# EAGLE board Spectroscilloscope Revised_3 (EAGLE 9.6.2)
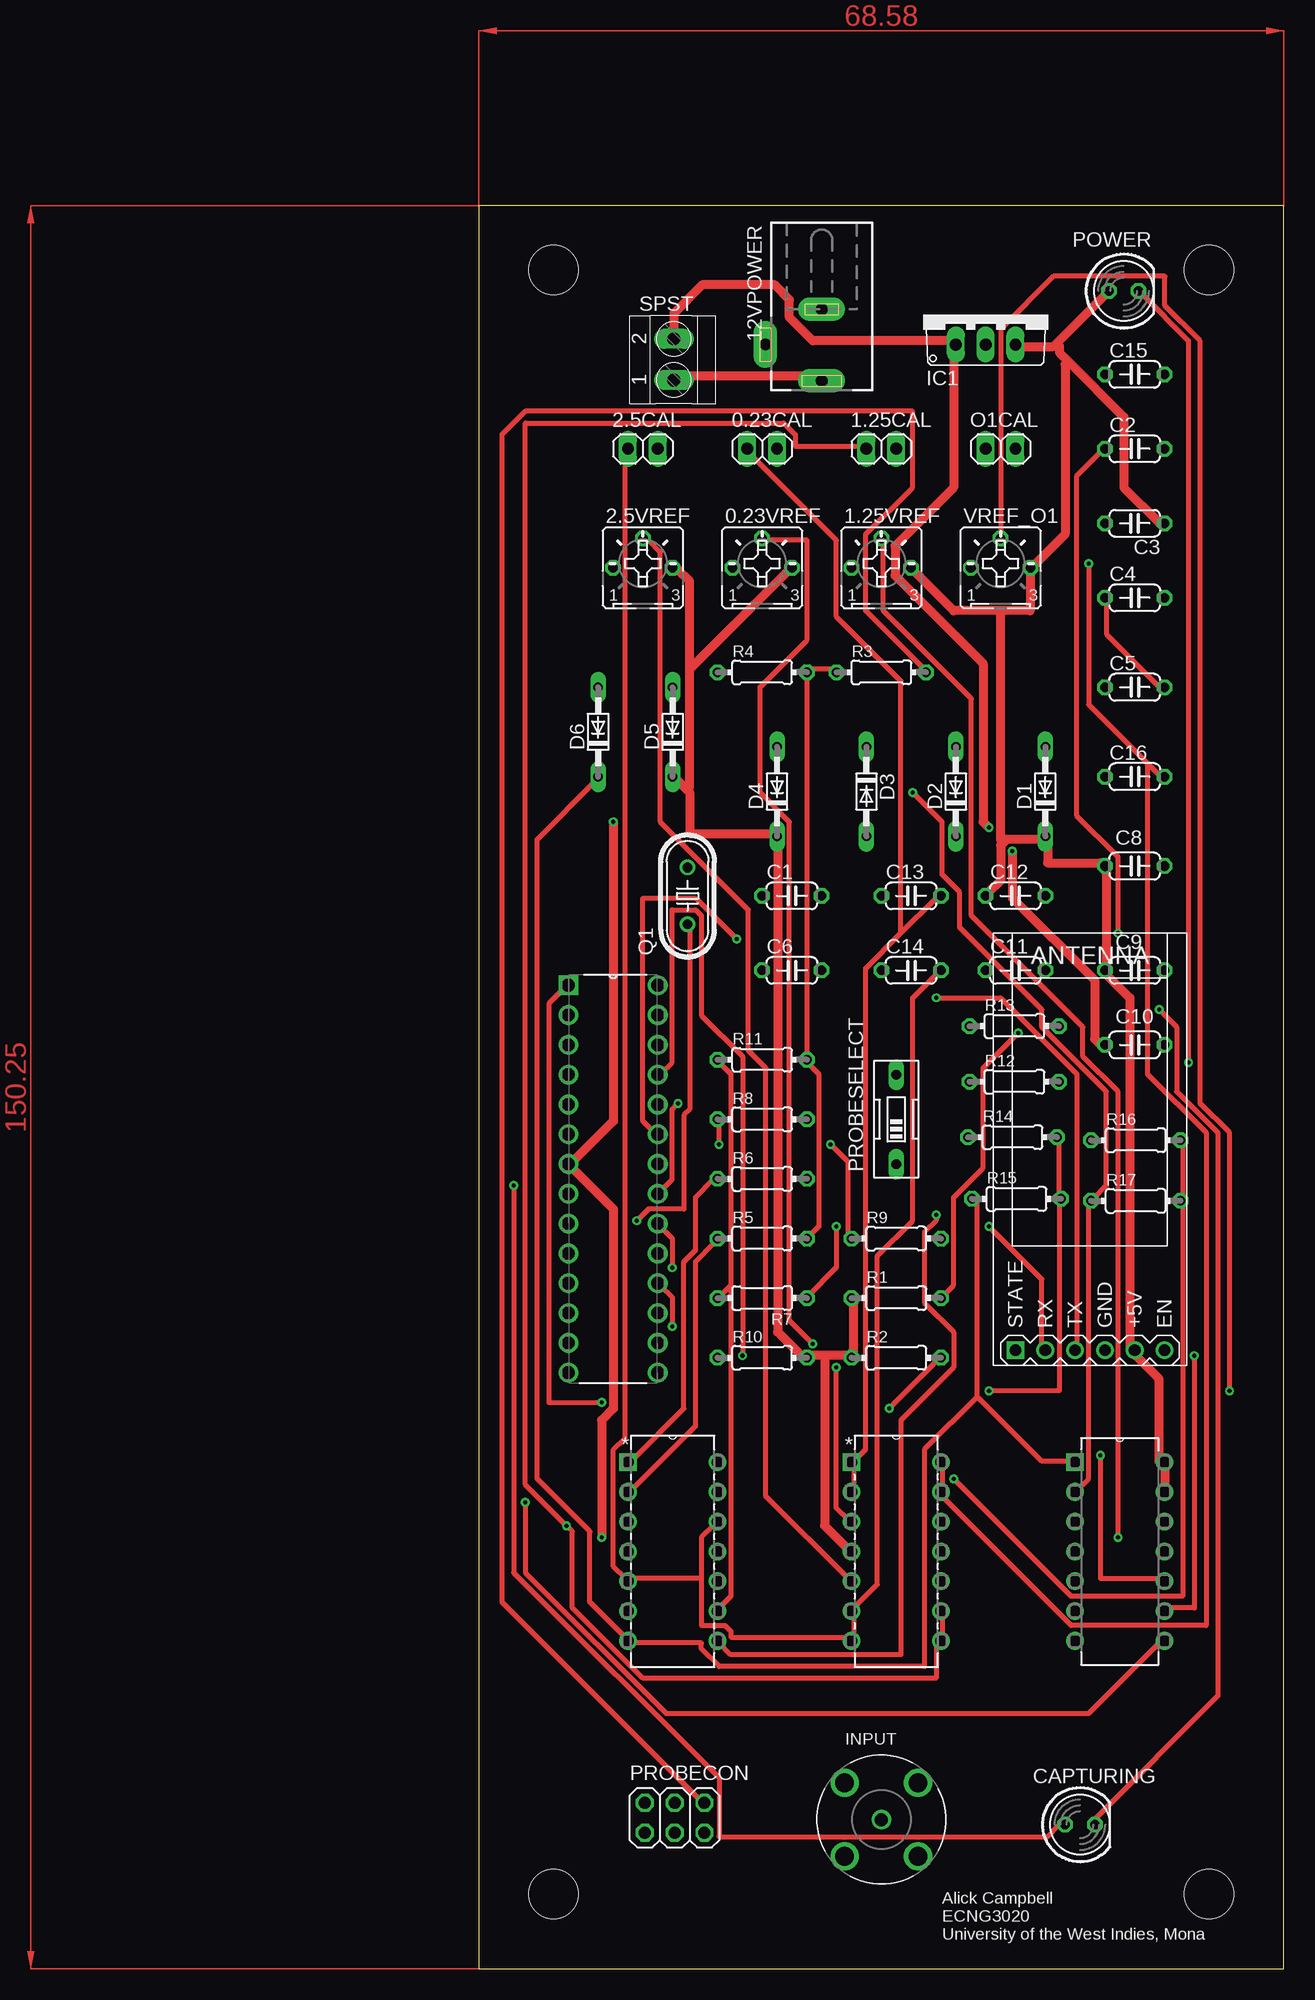
[diagram p0: board, top side]
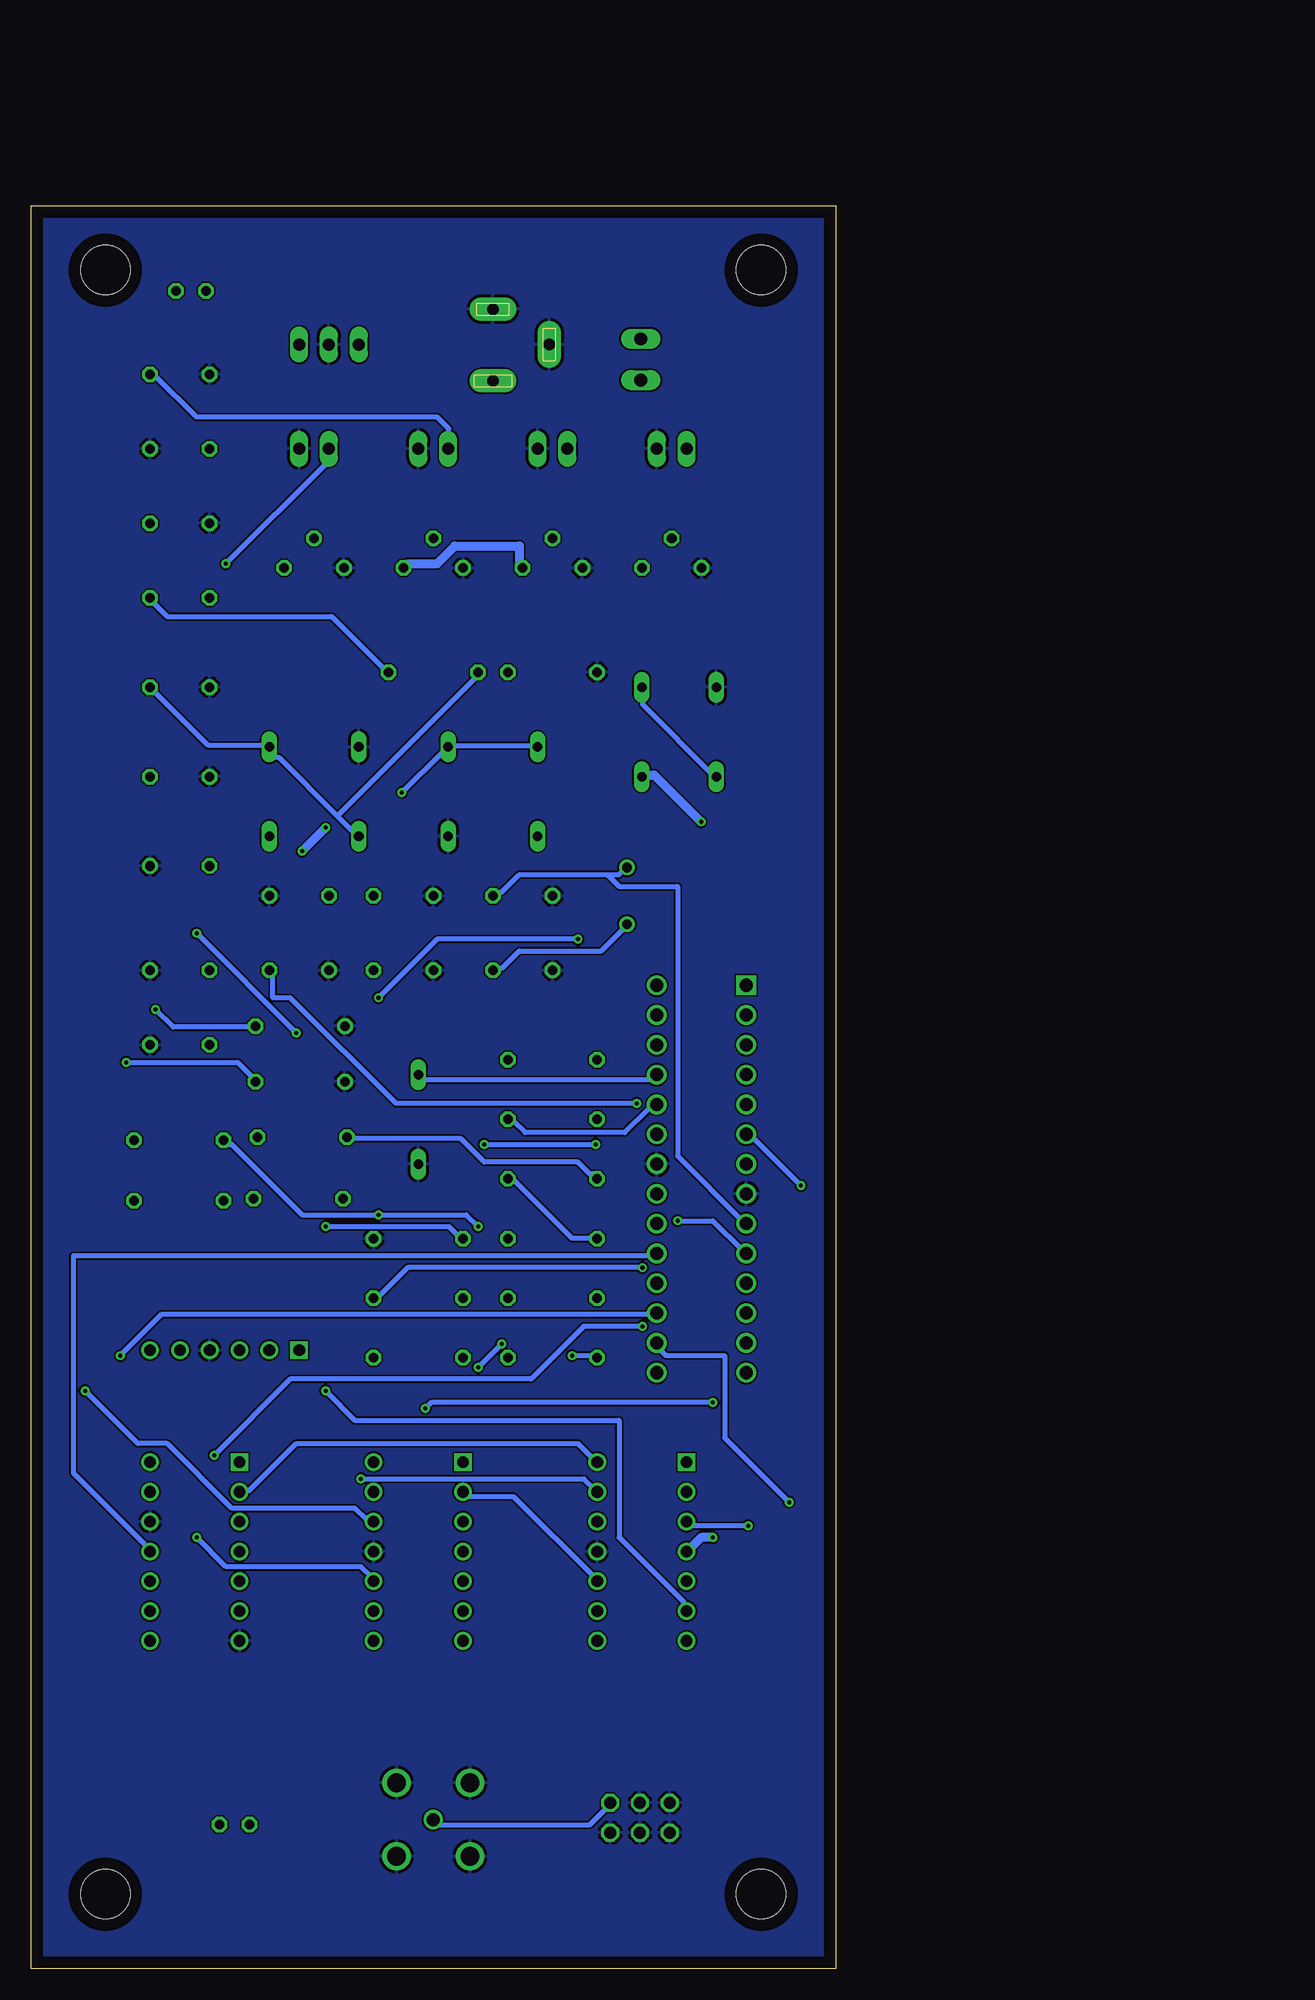
[diagram p1: board, bottom side, seen from below]

Size 68.56 x 150.25 mm. Coordinates in mm from the lower left corner, seen from the top.
Outline: 0,0 68.56,0 68.56,150.25 0,150.25 0,0
Copper layers (1*16): Top 0.035mm / dielectric 1.5mm / Bottom 0.035mm
Design rules "default": minimum track width 6mil, minimum drill 0.35mm, track to track 6mil, track to pad 6mil, pad to pad 6mil, via to via 6mil, smd to smd 6mil, copper to edge 40mil, drill to drill 6mil, minimum pad ring 10mil, minimum via ring 8mil, stop-mask expansion 4mil, vias tented up to drill 0mil, thermal gap 10mil
Net classes: 0 default: width 0.406 mm, clearance 0.102 mm; 1 Power Lines: width 0.762 mm, clearance 0.13 mm
Holes 4.2 mm at 6.35,6.35 62.23,6.35 62.23,144.78 6.35,144.78

## Footprints (pad centres in the part's own frame; a part is rotated, then mirrored left to right if it is on the bottom)
1X02 = drill 1.016 long: 1 -1.27,0; 2 1.27,0
B25P = drill 0.813 octagon: A -2.54,0; E 2.54,0; S 0,2.54
DCJ0303 = drill 1 pad 2 long: 1 0,3.1; 2 4.8,0; 3 0,-3
C050-024X044 = drill 0.813 octagon: 1 -2.54,0; 2 2.54,0
LED5MM = drill 0.813 octagon: A -1.27,0; K 1.27,0
DO34-7 = drill 0.813 long: A 3.81,0; C -3.81,0
WIRELESS-BLUETOOTH-HC-05 = drill 1 square: 1 -6.35,-17.145 | drill 1: 2 -3.81,-17.145; 3 -1.27,-17.145; 4 1.27,-17.145; 5 3.81,-17.145; 6 6.35,-17.145
TO220V = drill 1.016 long: 1 -2.54,-2.54; 2 0,-2.54; 3 2.54,-2.54
TE_5-1634503-1 = drill 1.1: 1 0,0 | drill 1.6: 2 -3.13,3.13; 3 3.13,3.13; 4 3.13,-3.13; 5 -3.13,-3.13
2X03 = drill 1.016 octagon: 1 -2.54,-1.27; 2 -2.54,1.27; 3 0,-1.27; 4 0,1.27; 5 2.54,-1.27; 6 2.54,1.27
EDG-01 = drill 0.813 long: 1 0,-3.81; 2 0,3.81
HC49U-V = drill 0.813: 1 -2.413,0; 2 2.413,0
0204/7 = drill 0.813 octagon: 1 -3.81,0; 2 3.81,0
TERMINAL-BLOCK-2-PIN-3.5MM-LONG-PAD = drill 1.1 pad 1.7 long: 1 -1.75,-0.1; 2 1.75,-0.1
DIP254P762X457-28 = drill 1.118 square: 1 -7.62,33.02 | drill 1.118: 2 -7.62,30.48; 3 -7.62,27.94; 4 -7.62,25.4; 5 -7.62,22.86; 6 -7.62,20.32; 7 -7.62,17.78; 8 -7.62,15.24; 9 -7.62,12.7; 10 -7.62,10.16; 11 -7.62,7.62; 12 -7.62,5.08; 13 -7.62,2.54; 14 -7.62,0; 15 0,0; 16 0,2.54; 17 0,5.08; 18 0,7.62; 19 0,10.16; 20 0,12.7; 21 0,15.24; 22 0,17.78; 23 0,20.32; 24 0,22.86; 25 0,25.4; 26 0,27.94; 27 0,30.48; 28 0,33.02
DIP254P762X533-14 = drill 0.991 square: 1 -7.62,15.24 | drill 0.991: 2 -7.62,12.7; 3 -7.62,10.16; 4 -7.62,7.62; 5 -7.62,5.08; 6 -7.62,2.54; 7 -7.62,0; 8 0,0; 9 0,2.54; 10 0,5.08; 11 0,7.62; 12 0,10.16; 13 0,12.7; 14 0,15.24
DIP254P762X432-14 = drill 0.991 square: 1 -7.62,15.24 | drill 0.991: 2 -7.62,12.7; 3 -7.62,10.16; 4 -7.62,7.62; 5 -7.62,5.08; 6 -7.62,2.54; 7 -7.62,0; 8 0,0; 9 0,2.54; 10 0,5.08; 11 0,7.62; 12 0,10.16; 13 0,12.7; 14 0,15.24

## Placement (x,y rotation side)
0.23CAL  [1X02]  24.13,129.54 0 top
0.23VREF  100k  [B25P]  24.13,119.38 0 top
1.25CAL  [1X02]  34.29,129.54 0 top
1.25VREF  100k  [B25P]  34.29,119.38 0 top
2.5CAL  [1X02]  13.97,129.54 0 top
2.5VREF  100k  [B25P]  13.97,119.38 0 top
12VPOWER  [DCJ0303]  29.21,138.43 180 top
C1  22pF  [C050-024X044]  26.67,91.44 0 top
C2  0.1uF  [C050-024X044]  55.88,129.54 0 top
C3  0.1u  [C050-024X044]  55.88,123.19 180 top
C4  22pF  [C050-024X044]  55.88,116.84 0 top
C5  180pF  [C050-024X044]  55.88,109.22 0 top
C6  22pF  [C050-024X044]  26.67,85.09 0 top
C8  0.1uF  [C050-024X044]  55.88,93.98 0 top
C9  10uF  [C050-024X044]  55.88,85.09 0 top
C10  220uF  [C050-024X044]  55.88,78.74 0 top
C11  0.1uF  [C050-024X044]  45.72,85.09 0 top
C12  10nF  [C050-024X044]  45.72,91.44 0 top
C13  0.1u  [C050-024X044]  36.83,91.44 0 top
C14  0.1u  [C050-024X044]  36.83,85.09 0 top
C15  0.1u  [C050-024X044]  55.88,135.89 0 top
C16  0.1u  [C050-024X044]  55.88,101.6 0 top
CAPTURING  [LED5MM]  51.22,12.27 0 top
D1  BAT81  [DO34-7]  48.26,100.33 90 top
D2  BAT81  [DO34-7]  40.64,100.33 90 top
D3  BAT81  [DO34-7]  33.02,100.33 270 top
D4  BAT81  [DO34-7]  25.4,100.33 90 top
D5  BAT81  [DO34-7]  16.51,105.41 90 top
D6  BAT81  [DO34-7]  10.16,105.41 90 top
HC05  WIRELESS-BLUETOOTH-HC-05  [WIRELESS-BLUETOOTH-HC-05]  52.07,69.85 0 top
IC1  7805TV  [TO220V]  43.18,140.97 0 top
INPUT  5-1634503-1  [TE_5-1634503-1]  34.29,12.7 0 top
O1CAL  [1X02]  44.45,129.54 0 top
POWER  [LED5MM]  54.94,142.98 0 top
PROBECON  [2X03]  16.68,12.86 0 top
PROBESELECT  [EDG-01]  35.56,72.39 0 top
Q1  16MHz  [HC49U-V]  17.78,91.44 90 top
R1  10k  [0204/7]  35.56,57.15 0 top
R2  10k  [0204/7]  35.56,52.07 0 top
R3  909k  [0204/7]  34.29,110.49 0 top
R4  100k  [0204/7]  24.13,110.49 0 top
R5  1k  [0204/7]  24.13,62.23 0 top
R6  1k  [0204/7]  24.13,67.31 0 top
R7  10k  [0204/7]  24.13,57.15 180 top
R8  1k  [0204/7]  24.13,72.39 0 top
R9  2k  [0204/7]  35.56,62.23 0 top
R10  10k  [0204/7]  24.13,52.07 0 top
R11  1k  [0204/7]  24.13,77.47 0 top
R12  330  [0204/7]  45.63,75.6 0 top
R13  330  [0204/7]  45.63,80.34 0 top
R14  1k  [0204/7]  45.47,70.87 0 top
R15  1k  [0204/7]  45.81,65.61 0 top
R16  1k  [0204/7]  55.97,70.61 0 top
R17  1k  [0204/7]  55.97,65.45 0 top
SPST  TERMINAL-BLOCK-3.5MM-2-PIN-LONG-PAD  [TERMINAL-BLOCK-2-PIN-3.5MM-LONG-PAD]  16.51,137.16 90 top
U1  ATMEGA328P-PU  [DIP254P762X457-28]  15.24,50.8 0 top
U2  MCP6024-I/P  [DIP254P762X533-14]  20.32,27.94 0 top
U3  MCP6024-I/P  [DIP254P762X533-14]  39.37,27.94 0 top
U$1  MCP3004-I/P  [DIP254P762X432-14]  58.42,27.94 0 top
VREF_O1  100k  [B25P]  44.45,119.38 0 top

## Library data of the parts
0.23CAL 1.25CAL 2.5CAL O1CAL PROBECON = pinhead
0.23VREF 1.25VREF 2.5VREF VREF_O1 = pot
12VPOWER = con-jack
C1-C6 C8-C16 = rcl; SPICEPREFIX: C
CAPTURING POWER = led
D1-D6 = diode
HC05 = diy-modules
IC1 = linear
INPUT = 5-1634503-1; AVAILABILITY: Good; COMMENT: 5-1634503-1; DESCRIPTION: Rf / Coaxial Connector, Bnc Coaxial, Straight Jack, Solder, 50 Ohm, Brass; EU_ROHS_COMPLIANCE: Compliant; MF: TE Connectivity; MP: 5-1634503-1; NUMBER_OF_POSITIONS: 1; PACKAGE: None; PRICE: None; PURCHASE-URL: https://pricing.snapeda.com/search/part/5-1634503-1/?ref=eda
PROBESELECT = special
Q1 = crystal; OC_FARNELL: 1666969; OC_NEWARK: unknown
R1-R17 = rcl; SPICEPREFIX: R
SPST = Rembrandt Electronics - Terminal Block 3-5mm v1-0
U1 = ATMEGA328P-PU; AVAILABILITY: Good; DESCRIPTION: AVR AVR® ATmega Microcontroller IC 8-Bit 20MHz 32KB (16K x 16) FLASH 28-PDIP; DIGIKEY-PURCHASE-URL: https://snapeda.com/shop?store=DigiKey&id=2895131; MF: Microchip; MOUSER-PURCHASE-URL: https://snapeda.com/shop?store=Mouser&id=2895131; MP: ATMEGA328P-PU; PACKAGE: DIP-28 Generic; PRICE: None
U2 U3 = MCP6024-I_P; AVAILABILITY: Warning; DESCRIPTION: IC OPAMP GP 4 CIRCUIT 14DIP; MF: Microchip Technology; MP: MCP6024-I/P; PACKAGE: None; PRICE: None; PURCHASE-URL: https://pricing.snapeda.com/search/part/MCP6024-I/P/?ref=eda
U$1 = MCP3004-I_P; AVAILABILITY: Unavailable; DESCRIPTION: 10 Bit Analog to Digital Converter 2, 4 Input 1 SAR 14-PDIP; MF: Microchip; MP: MCP3004-I/P; PACKAGE: DIP-14 Microchip; PRICE: None

## Nets
0.23VREF: 0.23CAL.1 C13.2 U2.10 U3.1 U3.2
1.25VREF: 1.25CAL.1 C15.2 U2.3 U3.8 U3.9
1X/10X: PROBESELECT.2 R10.1 U1.25
2.5VREF: 2.5CAL.1 C14.2 U2.5 U2.12 U3.6 U3.7
+12V [Power Lines]: C10.1 IC1.1 SPST.2
+12VI [Power Lines]: 12VPOWER.1 SPST.1
CAPTURING: CAPTURING.A U1.6
COMPANDED: C4.1 C5.2 D1.A D2.C R3.1 R4.2 R5.2 R11.2
GND [Power Lines]: 0.23CAL.2 0.23VREF.A 1.25CAL.2 1.25VREF.A 2.5CAL.2 2.5VREF.A 12VPOWER.2 12VPOWER.3 C1.1 C2.2 C3.2 C5.1 C6.1 C8.2 C9.2 C10.2 C11.1 C12.2 C13.1 C14.1 C15.1 C16.1 D2.A D3.A D6.A HC05.4 IC1.2 INPUT.2 INPUT.3 INPUT.4 INPUT.5 O1CAL.2 PROBECON.1 PROBECON.2 PROBECON.3 PROBECON.4 PROBECON.5 PROBESELECT.1 R4.1 R9.2 R12.1 R13.1 U1.8 U1.22 U2.11 U3.11 U$1.7 U$1.12 VREF_O1.A
KEY: HC05.6
MISO: U1.18 U$1.10
MOSI: U1.17 U$1.9
N$1: C1.2 Q1.2 U1.9
N$2: C6.2 Q1.1 U1.10
N$3: 2.5VREF.S U3.5
N$4: R6.1 R14.1 U2.1
N$5: R5.1 R6.2 U2.2
N$6: C11.2 U1.21
N$7: 1.25VREF.S U3.10
N$8: C2.1 R1.2 U1.20
N$9: 0.23VREF.S U3.3
N$10: U3.12 VREF_O1.S
N$12: POWER.K R12.2
N$13: CAPTURING.K R13.2
N$15: R14.2 R15.2 U2.6
N$16: R7.2 R11.1 U2.9
N$17: R8.2 U1.24
N$21: R16.2 R17.2 U2.13
N$22: R7.1 R16.1 U2.8
RST: R2.2 U1.1
RX: HC05.2 R8.1 R9.1
SCK: U1.19 U$1.11
STATE: HC05.1
TX: HC05.3 U1.23
VCC [Power Lines]: 0.23VREF.E 1.25VREF.E 2.5VREF.E C3.1 C8.1 C9.1 C12.1 D1.C D4.C D5.C HC05.5 IC1.3 POWER.A R1.1 R2.1 R10.2 U1.7 U2.4 U3.4 U$1.13 U$1.14 VREF_O1.E
VIN: C4.2 INPUT.1 PROBECON.6 R3.2
VREF_O1: C16.2 O1CAL.1 U3.13 U3.14
X1: D5.A D6.C R15.1 U2.7 U$1.1
X10: D3.C D4.A R17.1 U2.14 U$1.2
~SS: U1.16 U$1.8

## Tracks (layer width: path | path; a pad name or v marks a point on that pad's centre or on a via)
0.23VREF
  Top 0.406: 35.96,88.25 32.96,85.25 32.96,44.25 31.96,43.25 U3.1 31.96,42.75 31.96,40.75 U3.2 | 35.96,88.25 38.96,91.25 C13.2 | 35.96,88.25 35.96,109.75 30.46,115.25 30.46,121.75 22.96,129.25 0.23CAL.1
  Bottom 0.406: U2.10 20.46,33.25 27.46,40.25 31.46,40.25 U3.2
1.25VREF  (via drill 0.35)
  Top 0.406: U3.9 39.46,30.25 39.46,28.25 U3.8 38.96,27.75 38.96,24.75 13.96,24.75 7.96,30.75 7.96,37.25 v7.46,37.75 3.96,41.25 3.96,131.75 25.96,131.75 26.96,130.75 26.96,129.75 32.96,129.75 1.25CAL.1
  Bottom 0.406: C15.2 57.96,135.75 54.46,132.25 33.96,132.25 32.96,131.25 32.96,129.75 1.25CAL.1 | v7.46,37.75 12.46,37.75 U2.3
1X/10X  (via drill 0.35)
  Top 0.406: v22.46,52.25 22.46,77.75 18.96,81.25 18.96,89.75 18.46,90.25 16.46,90.25 16.46,77.25 15.46,76.25 U1.25
  Bottom 0.406: v22.46,52.25 20.46,52.25 R10.1 | PROBESELECT.2 35.46,75.75 15.46,75.75 U1.25
2.5VREF
  Top 0.406: C14.2 38.96,84.75 36.96,82.75 36.96,63.75 33.96,60.75 33.96,32.75 31.96,30.75 U3.6 31.96,30.25 31.96,28.25 U3.7 31.46,28.25 21.46,28.25 21.46,28.75 20.96,29.25 18.96,29.25 18.96,33.25 | 18.96,33.25 12.96,33.25 U2.5 12.46,33.25 11.46,34.25 11.46,44.25 12.46,45.25 12.46,129.25 2.5CAL.1 | 18.96,33.25 18.96,36.75 19.96,37.75 U2.12
+12V  (via drill 0.35)
  Top 0.762: v45.46,95.25 45.46,91.25 52.46,84.25 52.46,79.25 52.96,78.75 C10.1 | v43.46,97.25 42.96,97.75 42.96,111.25 35.46,118.75 35.46,121.25 40.46,126.25 40.46,138.25 IC1.1 40.46,138.75 28.46,138.75 26.46,140.75 26.46,142.25 25.2,143.51 19.05,143.51 16.61,141.07 SPST.2
  Bottom 0.762: v43.46,97.25 v45.46,95.25
+12VI
  Top 0.762: 12VPOWER.1 28.96,135.75 16.95,135.75 SPST.1
CAPTURING  (via drill 0.35)
  Top 0.406: v2.96,66.75 2.96,33.75 20.46,16.25 20.46,11.25 48.46,11.25 49.46,12.25 CAPTURING.A
  Bottom 0.406: v2.96,66.75 6.96,70.75 7.46,70.75 U1.6
COMPANDED
  Top 0.406: C5.2 57.96,109.25 53.46,113.75 53.46,116.75 C4.1 | R3.1 30.46,110.75 27.96,110.75 R4.2 27.96,110.25 27.96,77.75 R11.2 27.96,77.25 28.96,76.25 28.96,63.25 R5.2
  Bottom 0.406: 42.46,98.25 47.46,103.25 47.96,103.25 48.46,103.75 D1.A 48.46,104.25 53.46,104.25 57.96,108.75 C5.2 | 42.46,98.25 40.96,96.75 D2.C | 42.46,98.25 30.46,110.25 R3.1
GND
  pour Bottom: 0,0 68.58,0 68.58,150.24 0,150.24
MISO  (via drill 0.35)
  Top 0.406: v52.96,43.75 52.96,33.25 57.96,33.25 U$1.10 | v16.46,54.75 16.46,57.25 15.46,58.25 U1.18
  Bottom 0.406: v52.96,43.75 46.46,50.25 25.96,50.25 21.46,54.75 v16.46,54.75
MOSI  (via drill 0.35)
  Top 0.406: v60.96,52.25 60.96,30.75 58.46,30.75 U$1.9
  Bottom 0.406: v60.96,52.25 57.46,55.75 15.46,55.75 U1.17
N$1
  Bottom 0.406: 19.46,93.25 26.96,93.25 28.46,91.75 28.96,91.75 C1.2 | 19.46,93.25 18.46,93.25 17.96,93.75 Q1.2 | 19.46,93.25 18.46,92.25 13.46,92.25 13.46,69.25 7.96,63.75 U1.9
N$2  (via drill 0.35)
  Top 0.406: v13.46,63.75 14.46,64.75 17.46,64.75 17.46,72.75 17.96,73.25 17.96,88.75 Q1.1
  Bottom 0.406: Q1.1 17.96,88.75 19.96,86.75 26.96,86.75 28.46,85.25 28.96,85.25 C6.2 | v13.46,63.75 10.46,63.75 7.96,61.25 U1.10
N$3
  Top 0.406: 2.5VREF.S 14.46,121.75 15.46,120.75 15.46,97.75 22.96,90.25 22.96,78.25 24.46,76.75 24.46,40.25 31.46,33.25 U3.5
N$4
  Top 0.406: R6.1 19.96,67.25 18.46,65.75 18.46,61.25 17.46,60.25 17.46,47.75 12.96,43.25 U2.1
  Bottom 0.406: R14.1 41.46,70.75 31.96,70.75 29.96,68.75 21.96,68.75 20.96,67.75 20.46,67.75 R6.1
N$5
  Top 0.406: R5.1 19.96,61.75 18.46,60.25 18.46,46.25 12.96,40.75 U2.2
  Bottom 0.406: R6.2 27.46,67.25 22.46,62.25 20.46,62.25 R5.1
N$6  (via drill 0.35)
  Top 0.406: v16.96,73.75 16.46,73.25 16.46,67.25 15.46,66.25 U1.21
  Bottom 0.406: v16.96,73.75 37.46,73.75 46.46,82.75 47.96,82.75 47.96,84.75 C11.2
N$7  (via drill 0.35)
  Top 0.406: v54.46,36.75 54.46,74.75 51.46,77.75 51.46,80.25 41.96,89.75 41.96,108.25 34.46,115.75 34.46,121.75 1.25VREF.S
  Bottom 0.406: v54.46,36.75 51.96,34.25 40.46,34.25 39.46,33.25 U3.10
N$8  (via drill 0.35)
  Top 0.406: v16.46,59.75 16.46,62.25 15.46,63.25 U1.20 | v54.46,88.25 54.46,94.75 50.96,98.25 50.96,127.25 52.96,129.25 C2.1 | v45.96,79.75 42.96,76.75 42.96,68.25 40.46,65.75 40.46,58.25 39.46,57.25 R1.2
  Bottom 0.406: v16.46,59.75 36.46,59.75 38.96,57.25 R1.2 | v45.96,79.75 v54.46,88.25
N$9  (via drill 0.35)
  Top 0.406: v28.46,53.25 26.46,55.25 26.46,97.75 23.96,100.25 23.96,109.25 27.96,113.25 27.96,121.75 24.46,121.75 0.23VREF.S | v30.46,51.25 30.46,39.25 31.46,38.25 U3.3
  Bottom 0.406: v30.46,51.25 v28.46,53.25
N$10  (via drill 0.35)
  Top 0.406: v63.96,49.25 63.96,71.25 61.46,73.75 61.46,138.75 58.46,141.75 58.46,144.25 48.96,144.25 44.46,139.75 44.46,122.25 VREF_O1.S
  Bottom 0.406: v63.96,49.25 59.46,44.75 56.96,44.75 51.46,39.25 40.96,39.25 39.96,38.25 39.46,38.25 U3.12
N$12  (via drill 0.35)
  Top 0.406: v60.46,77.25 60.46,138.75 56.46,142.75 POWER.K
  Bottom 0.406: v60.46,77.25 50.96,77.25 49.46,75.75 R12.2
N$13  (via drill 0.35)
  Top 0.406: v57.96,81.75 59.46,80.25 59.46,74.75 62.96,71.25 62.96,23.25 52.46,12.75 CAPTURING.K
  Bottom 0.406: v57.96,81.75 56.46,80.25 49.46,80.25 R13.2
N$15  (via drill 0.35)
  Top 0.406: R14.2 49.46,70.75 49.46,65.75 R15.2 49.46,65.25 49.46,49.25 v43.46,49.25
  Bottom 0.406: v43.46,49.25 40.96,46.75 18.46,46.75 18.46,36.75 12.96,31.25 12.96,30.75 U2.6
N$16
  Top 0.406: 21.46,58.25 20.46,57.25 R7.2 | 21.46,58.25 21.46,76.25 20.46,77.25 R11.1 | 21.46,58.25 21.46,31.75 20.46,30.75 U2.9
N$17
  Bottom 0.406: R8.2 27.46,72.25 26.46,71.25 17.96,71.25 15.96,73.25 15.46,73.25 U1.24
N$21  (via drill 0.35)
  Top 0.406: R16.2 59.96,70.25 59.96,65.75 R17.2 59.96,65.25 59.96,31.75 50.46,31.75 v40.46,41.75
  Bottom 0.406: v40.46,41.75 21.46,41.75 20.46,40.75 U2.13
N$22  (via drill 0.35)
  Top 0.406: v30.46,63.25 30.46,59.75 27.96,57.25 R7.1 | v38.96,64.25 38.96,63.75 37.96,62.75 37.96,56.75 40.46,54.25 40.46,51.25 35.96,46.75 35.96,26.75 21.46,26.75 20.46,27.75 U2.8
  Bottom 0.406: v30.46,63.25 31.46,64.25 v38.96,64.25 45.46,64.25 51.46,70.25 51.96,70.25 R16.1
RST  (via drill 0.35)
  Top 0.406: v34.96,47.75 38.96,51.75 R2.2 | v10.46,48.25 5.96,48.25 5.96,82.25 7.46,83.75 U1.1
  Bottom 0.406: v34.96,47.75 34.46,48.25 v10.46,48.25
RX  (via drill 0.35)
  Top 0.406: v43.46,63.25 47.96,58.75 47.96,52.75 HC05.2 | v20.46,70.25 20.46,72.25 R8.1 | v29.96,70.25 31.46,68.75 31.46,62.25 R9.1
  Bottom 0.406: v43.46,63.25 32.96,63.25 31.96,62.25 R9.1 | v29.96,70.25 v20.46,70.25
SCK
  Bottom 0.406: U$1.11 58.46,35.75 64.96,42.25 64.96,60.75 15.46,60.75 U1.19
TX  (via drill 0.35)
  Top 0.406: v38.96,82.75 44.46,82.75 50.96,76.25 50.96,52.75 HC05.3 | v21.96,87.75 18.46,91.25 13.96,91.25 13.96,72.25 14.96,71.25 U1.23
  Bottom 0.406: v38.96,82.75 33.96,87.75 v21.96,87.75
VCC  (via drill 0.35)
  Top 0.762: v10.46,36.75 10.46,46.75 11.46,47.75 11.46,64.75 7.96,68.25 U1.7 7.96,68.75 11.46,72.25 v11.46,97.75 | 29.46,52.25 31.46,52.25 R2.1 31.96,52.25 31.96,56.75 R1.1 | 29.46,52.25 27.96,52.25 R10.2 27.46,52.25 25.46,54.25 25.46,96.25 D4.C 24.96,96.75 17.96,96.75 17.96,100.25 17.71,100.5 | 29.46,52.25 29.46,37.75 31.46,35.75 U3.4 | 17.71,100.5 16.96,101.25 D5.C | 17.96,110.75 17.96,100.75 17.71,100.5 | 17.96,110.75 17.96,118.25 16.96,119.25 2.5VREF.E | 17.96,110.75 26.46,119.25 0.23VREF.E | 1.25VREF.E 40.46,115.75 44.46,115.75 | 44.46,115.75 46.96,115.75 46.96,119.25 VREF_O1.E 47.46,119.75 49.96,122.25 49.96,136.75 50.21,137 | 49.21,138.5 48.96,138.25 45.96,138.25 IC1.3 | 49.21,138.5 53.46,142.75 POWER.A | 50.21,137 49.46,137.75 49.46,138.25 49.21,138.5 | 50.21,137 54.96,132.25 54.96,126.25 57.96,123.25 C3.1 | U$1.13 58.46,40.75 58.46,42.75 U$1.14 57.96,43.25 57.96,50.25 55.96,52.25 HC05.5 55.46,52.75 55.46,82.75 53.46,84.75 C9.1 53.46,85.25 53.46,93.75 C8.1 52.96,94.25 48.46,94.25 48.46,96.25 D1.C 47.96,96.25 44.96,96.25 44.71,96 | 44.71,96 44.46,95.75 44.46,92.75 43.46,91.75 C12.1 | 44.46,115.75 44.46,96.25 44.71,96
  Bottom 0.762: v10.46,36.75 11.46,36.75 12.46,35.75 U2.4 | v11.46,97.75 15.46,101.75 16.46,101.75 D5.C | 0.23VREF.E 26.96,119.75 26.96,121.25 32.46,121.25 33.96,119.75 36.46,119.75 1.25VREF.E
VIN
  Top 0.406: PROBECON.6 18.96,14.25 1.96,31.25 1.96,130.75 3.96,132.75 36.96,132.75 36.96,126.25 32.96,122.25 32.96,115.75 37.96,110.75 R3.2
  Bottom 0.406: PROBECON.6 19.46,13.75 20.96,12.25 33.96,12.25 INPUT.1 | R3.2 38.46,110.75 42.96,115.25 56.96,115.25 58.46,116.75 C4.2
VREF_O1  (via drill 0.35)
  Top 0.406: U3.14 39.46,42.75 39.46,40.75 U3.13 39.46,40.25 50.46,29.25 61.96,29.25 61.96,71.25 56.96,76.25 56.96,102.75 | 56.96,102.75 51.96,107.75 v51.96,119.75 | 56.96,102.75 57.96,101.75 C16.2
  Bottom 0.406: v51.96,119.75 43.46,128.25 43.46,129.25 O1CAL.1
X1
  Top 0.406: 42.46,48.75 42.46,65.25 R15.1 | 42.46,48.75 47.96,43.25 50.46,43.25 U$1.1 | 42.46,48.75 37.96,44.25 37.96,25.75 20.46,25.75 18.96,27.25 18.96,27.75 12.96,27.75 U2.7 12.46,28.25 9.46,31.25 9.46,37.25 4.96,41.75 4.96,96.25 9.96,101.25 D6.C
  Bottom 0.406: D6.C 10.46,101.75 16.46,107.75 16.46,108.75 D5.A
X10  (via drill 0.35)
  Top 0.406: U$1.2 50.96,40.75 51.96,41.75 51.96,65.25 R17.1 52.46,65.75 53.46,66.75 53.46,74.75 47.96,80.25 47.96,81.75 40.96,88.75 40.96,91.75 39.46,93.25 39.46,97.75 v36.96,100.25
  Bottom 0.406: D4.A 25.46,104.25 32.96,104.25 D3.C 33.46,103.75 v36.96,100.25 | U2.14 20.46,43.25 21.96,44.75 45.96,44.75 49.96,40.75 50.46,40.75 U$1.2
~SS  (via drill 0.35)
  Top 0.406: v3.96,39.75 3.96,33.75 15.96,21.75 51.96,21.75 57.96,27.75 U$1.8
  Bottom 0.406: v3.96,39.75 9.46,45.25 9.46,52.25 14.46,52.25 15.46,53.25 U1.16
(copper drawn outside any net)
  shapes: Top area x2

## Text on the board
tPlace: Alick Campbell / ECNG3020 / University of the West Indies, Mona